# Altium PCB ljuc pcb.PcbDoc
Units mil, origin at the board's own origin, x right, y up, seen from the top; angles counter-clockwise.
Board outline 1722.09 x 1057.77 mil, 2 copper layers (Top Layer, Bottom Layer); 45 components, 45 nets, 138 pads, 20 vias.
Unrouted connection lines stored in the file: 1.
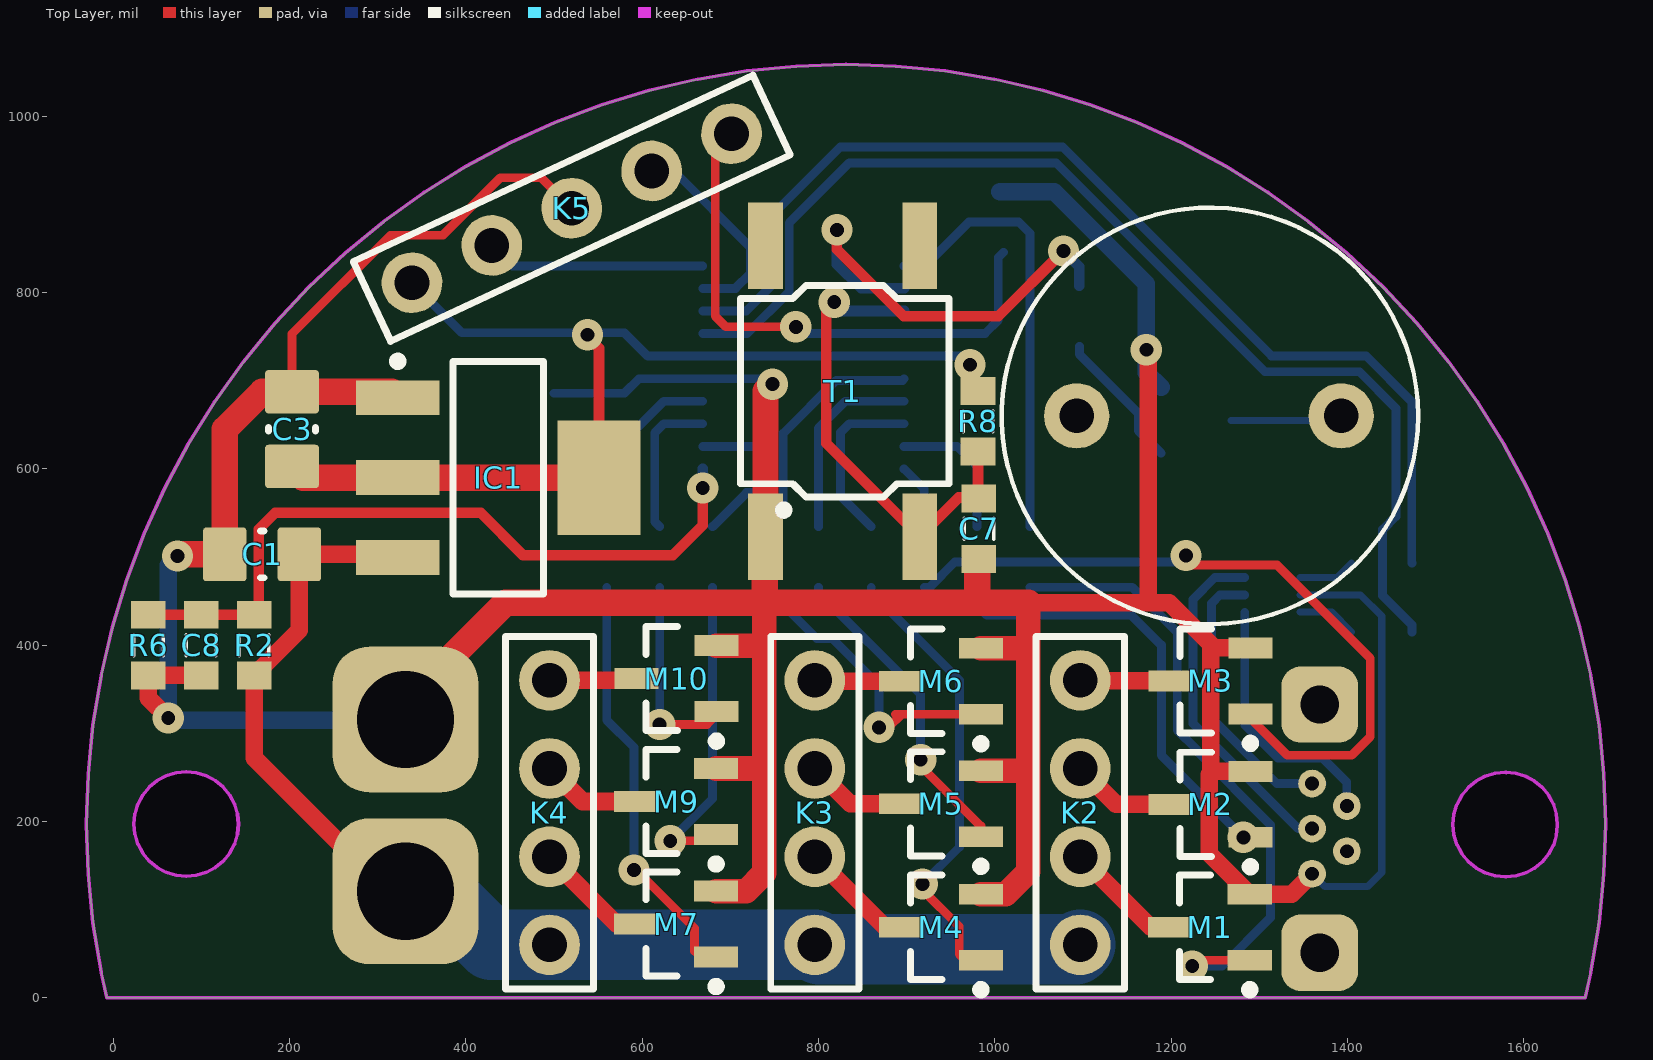
[diagram p0: Top Layer view]
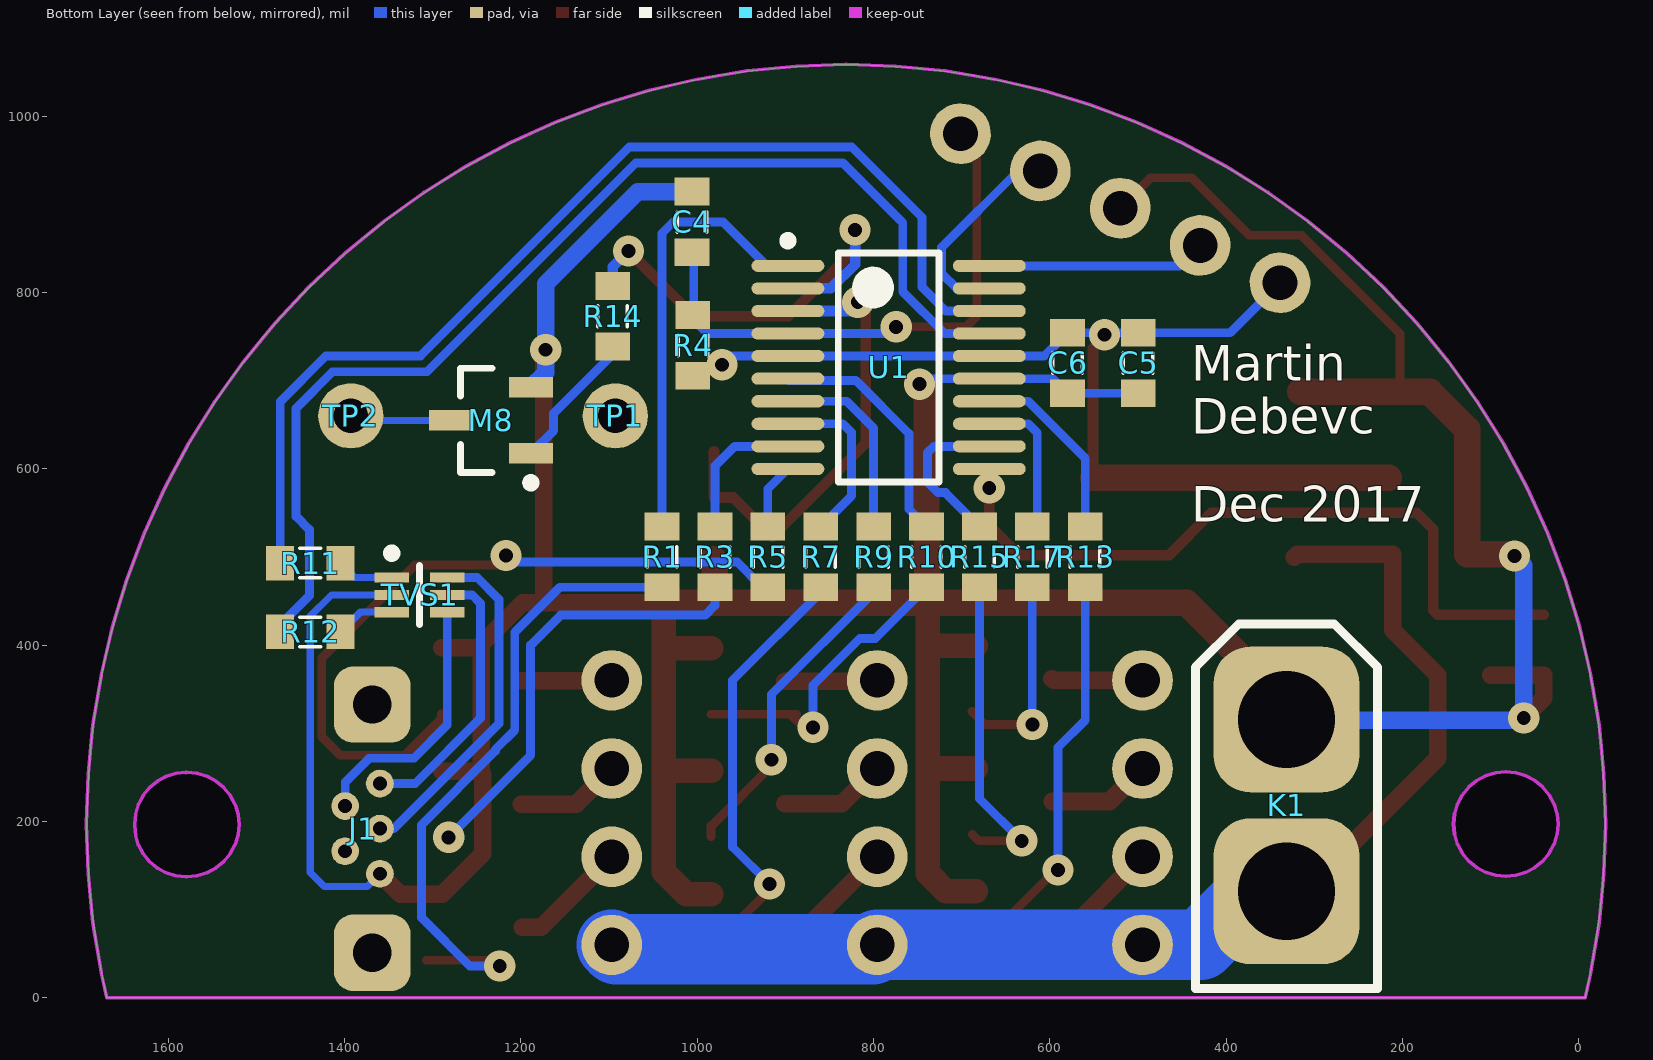
[diagram p1: Bottom Layer view, seen from below]

## Layer stack, top to bottom
Top Solder: solder mask 0.4, Solder Resist, Dk 3.5
Top Layer: signal copper 1.4
Dielectric 1: dielectric 12.6, FR-4, Dk 4.8
Bottom Layer: signal copper 1.4
Bottom Solder: solder mask 0.4, Solder Resist, Dk 3.5

## Board outline
-6.95,0.25 cw(c831.32,197.1) 1669.59,0.25
cut-out: 1638,196.5 ccw(c1579.5,197) 1580,255.5 1579,255.5 ccw(c1579,196.5) 1520,196.5 ccw(c1579,196.5) 1579,137.5 1580,137.5 ccw(c1580,195.5) 1638,195.5
cut-out: 142,197 ccw(c83,197) 83,256 ccw(c83,197) 24,197 ccw(c83,197) 83,138 ccw(c83,197)

## Design rules (kind name [scope] priority, off if disabled: settings)
Clearance [All] p1: gap=8
DiffPairsRouting [All] p1: maxlimit=10 minlimit=10 mostfreqgap=10 toplayer_minwidth=10 toplayer_maxwidth=10 toplayer_prefwidth=10 bottomlayer_minwidth=10 bottomlayer_maxwidth=10 bottomlayer_prefwidth=10 maxuncoupledlength=500
PolygonConnect [All] p1: connectstyle=Relief reliefconductorwidth=10 reliefentries=4 polygonreliefangle="90 Angle" airgapwidth=10
RoomDefinition "ljus sch" [InComponentClass('ljus sch')] p1 off: confinementstyle=ConfineIn formatcopy=TRUE lockcomponents=FALSE outline -1500,-2265 500,-2265 500,-1265 -1500,-1265
RoutingVias [All] p1: holewidth=28 width=50 viastyle="Through Hole" minholewidth=28 minwidth=50 maxholewidth=28 maxwidth=50
SolderMaskExpansion [All] p1: expansion=4
Width [All] p1: maxlimit=100 minlimit=6 preferedwidth=20 minimp=50.000000 maximp=50.000000 favimp=50.000000
28 further rules are at their usual default settings.

## Components (designator, comment, footprint, x,y, rotation, side; value= is the part's Value field where it differs from the comment)
C1 "10u" C0805(2012)_M 169,503 r180 top
C3 "10u" C0805(2012)_M 203,645 r90 top
C4 "100n" 0603 1006,880 r90 bottom
C5 "2u2" 0603 500,720 r270 bottom
C6 "100n" 0603 580,720 r270 bottom
C7 "100n" 0603 982,532 r270 top
C8 "100n" 0603 100,400 r270 top
IC1 "LM1117-3V3" SOT233 437,590 r0 top
J1 "USB Mini AB" USB3131-30-0230-A 1360,243 r270 bottom
K1 "H1x2" XT-30 435,424 r270 bottom
K2 "H1x4" H1x4 1097,60 r270 top
K3 "H1x4" H1x4 796,60 r270 top
K4 "H1x4" H1x4 495,60 r270 top
K5 "H1x5" H1x5 339,811 r205 top
M1 "BSS138" SOT23-BSS138 1244,80 r180 top
M2 "BSS138" SOT23-BSS138 1244.72,219.4 r180 top
M3 "BSS138" SOT23-BSS138 1244.72,359.4 r180 top
M4 "BSS138" SOT23-BSS138 939,80 r180 top
M5 "BSS138" SOT23-BSS138 939,220 r180 top
M6 "BSS138" SOT23-BSS138 939,359 r180 top
M7 "BSS138" SOT23-BSS138 638.72,83.6 r180 top
M8 "BSS138" SOT23-BSS138 1234,655 r0 bottom
M9 "BSS138" SOT23-BSS138 638.72,222.6 r180 top
M10 "BSS138" SOT23-BSS138 639,362 r180 top
R1 "220R" 0603 1040,500 r270 bottom
R2 "22k" 0603 160,400 r90 top
R3 "220R" 0603 980,500 r270 bottom
R4 "10k" 0603 1005,740 r270 bottom
R5 "220R" 0603 920,500 r270 bottom
R6 "6k8" 0603 40,400 r270 top
R7 "220R" 0603 860,500 r270 bottom
R8 "10k" 0603 981,654 r90 top
R9 "220R" 0603 800,500 r270 bottom
R10 "220R" 0603 740,500 r270 bottom
R11 "22E" 0603 1439,493 r180 bottom
R12 "22E" 0603 1439,415 r180 bottom
R13 "220R" 0603 560,500 r270 bottom
R14 "220R" 0603 1096,773 r270 bottom
R15 "220R" 0603 680,500 r270 bottom
R17 "220R" 0603 620,500 r270 bottom
T1 "MINI 6X6" "SW 5x6 SMD SHORT" 830,688 r90 top
TP1 "PAD" PAD_CIRC_HOLE 1093,660 r0 bottom
TP2 "PAD" PAD_CIRC_HOLE 1393,660 r0 bottom
TVS1 "USBLC6-2P6" SOT23127P600-8N 1315,457 r180 bottom
U1 "STM32F042F6Px" STM-TSSOP20_M 783,715 r180 bottom

## Footprints (in the part's own frame and the unit in brackets; to place one, negate y for a bottom-side part, rotate by r counter-clockwise, add the part's x,y. Pads: shape width x height; smd on the part's side, far side on the other; paste and mask are expansions set on the pad)
0603 [mm]
  rect 0.8x1 smd paste+0 mask+0.102: 1(-0.873,0) 2(0.873,0)
  silkscreen extent -0.3,-0.43 0.3,0.43, body extent -0.8,-0.4 0.8,0.4, height 0.45
C0805(2012)_M [mm] "Chip Capacitor, 2-Leads, Body 2.05x1.25mm, IPC Low Density"
  rrect15% 1.25x1.55 smd: 1(-1.075,0) 2(1.075,0)
  silkscreen extent -0.05,-0.67 0.05,0.67, body extent -1.1,-0.7 1.1,0.7, height 1.4
H1x4 [mm]
  round 1.75 hole 1: 1(0,0) 2(-2.54,0) 3(-5.08,0) 4(-7.62,0)
  silkscreen extent -8.89,-1.27 1.27,1.27, body extent -8.89,-1.27 1.27,1.27, height 8.4
H1x5 [mm]
  round 1.75 hole 1: 1(0,0) 2(-2.54,0) 3(-5.08,0) 4(-7.62,0) 5(-10.16,0)
  silkscreen extent -11.43,-1.27 1.27,1.27, body extent -11.43,-1.27 1.27,1.27, height 8.4
PAD_CIRC_HOLE [mil]
  round 74 hole 39.4: 1(0,0)
SOT23-BSS138 [mm]
  rect 1.27x0.6 smd: 1(-1.15,0.95) 2(-1.15,-0.95) 3(1.15,0)
  silkscreen extent -1.28,-1.5 0.87,1.92, body extent -1.14,-1.45 1.16,1.45, height 1.02
SOT233 [mm] "SOT223, 4-Leads, Body 6,7x7,3mm (max), Pitch 2,30mm, IPC Medium Density"
  rect 2.4x1 smd: 1(-2.9,2.3) 2(-2.9,0) 3(-2.9,-2.3)
  rect 2.4x3.3 smd: 2(2.9,0)
  silkscreen extent -3.02,-3.35 1.3,3.47, body extent -1.85,-3.35 1.85,3.35, height 1.8
SOT23127P600-8N [mm]
  rect 1x0.292 smd: 1(-0.8,0.5) 2(-0.8,0) 3(-0.8,-0.5) 4(0.8,-0.5) 5(0.8,0) 6(0.8,0.5)
  silkscreen extent -0.93,-0.85 0,1.32, body extent -0.65,-0.85 0.65,0.85, height 0.6
STM-TSSOP20_M [mm] "SOP, 20-Leads, Body 6.6x4.5mm, Pitch 0.65mm, IPC Low Density"
  oval 2.1x0.35 smd: 1(-2.9,2.925) 2(-2.9,2.275) 3(-2.9,1.625) 4(-2.9,0.975) 5(-2.9,0.325) 6(-2.9,-0.325) 7(-2.9,-0.975) 8(-2.9,-1.625) 9(-2.9,-2.275) 10(-2.9,-2.925) 11(2.9,-2.925) 12(2.9,-2.275) 13(2.9,-1.625) 14(2.9,-0.975) 15(2.9,-0.325) 16(2.9,0.325) 17(2.9,0.975) 18(2.9,1.625) 19(2.9,2.275) 20(2.9,2.925)
  silkscreen extent -3.03,-3.3 1.45,3.77, body extent -2.25,-3.3 2.25,3.3, height 1.2
"SW 5x6 SMD SHORT" [mil]
  rect 98.43x39.37 smd: 1(-165,90) 2(-165,-85) 3(165,-85) 4(165,90)
  silkscreen extent -140,-118 120,118, body extent -175,-115 179,121, height 197
USB3131-30-0230-A [mm]
  round 0.8 hole 0.4: 1(0,0) 2(0.65,-1) 3(1.3,0) 4(1.95,-1) 5(2.6,0)
  rrect50% 2.2x2.2 hole 1.1: S(-2.275,-0.22) S(4.875,-0.22)
  body extent -2.67,-1.68 5.27,1.25, height 1.47
XT-30 [mm]
  rrect50% 4.2x4.2 hole 2.8: 1(7.7,2.625) 2(2.75,2.625)
  silkscreen extent 0,0 10.5,5.25, body extent 0,0 10.45,5.25, height 12.6

## Part data
C1 C3 C4 C5 C6 C7 C8: library part C, "Capacitor"
J1: "SOCKET, USB MINI-AB THRU HOLE"
K1: "Header 1x2 (male)"
K2 K3 K4: "Header 1x4 (male)"
K5: "Header 1x5 (male)"
R1 R2 R3 R4 R5 R6 R7 R8 R9 R10 R13 R14 R15 R17: library part R, "R"
R11 R12: library part Res2, "Resistor"

## Via types
v1: diameter 35.43, hole 15.75, Top Layer to Bottom Layer, tented both sides, 20 vias

## Nets (pads, with @x,y where several pads share a name; then routed paths per layer and width w, separated by ;. In a path a pad name is that pad's centre, name@x,y a point inside that pad or via, vN(x,y) a via of type N, cw(c..) or ccw(c..) an arc to the next point about the centre after c; other vN are vias at no path point)
ADC0: C8.1 R2.2 R6.1 U1.11 | length 828.3
  Top Layer w12: R6.1 C8.1 R2.2 ; R2.2 165.28,439.65 165.28,531.28 184,550 417,550 465,502 635,502 668.83,535.83 v1(668.83,578.17)
  Bottom Layer w12: v1(668.83,578.17) U1.11
B1: K2.4 M3.3 | length 102.7
  Top Layer w20: K2.4 1097.6,359.4 M3.3
B2: K3.4 M6.3 | length 105.1
  Top Layer w20: K3.4 797,359 M6.3 M6.3@900.72,359
B3: K4.4 M10.3 | length 103.6
  Top Layer w20: K4.4 595.72,360 M10.3@597.72,362
Button: C7.1 R8.1 T1.2 U1.3 | length 533.6
  Top Layer w12: v1(818,789) 809,780 809,629 T1.2 959.38,567.38 981,567.38 R8.1
  Bottom Layer w12: v1(818,789) 828.02,778.98 U1.3
Buzz: R14.1 U1.2 | length 514.7
  Top Layer w12: v1(821,871) 821,849 897,773 1004,773 v1(1078,847)
  Bottom Layer w12: v1(821,871) 821,832 848.43,804.57 U1.2 ; v1(1078,847) 1096,829 R14.1
G1: K2.3 M2.3 | length 119.3
  Top Layer w20: K2.3 1137.6,219.4 M2.3
G2: K3.3 M5.3 | length 121.3
  Top Layer w20: K3.3 836,220 M5.3 M5.3@900.72,220
G3: K4.3 M9.3 | length 117.9
  Top Layer w20: K4.3 532.4,222.6 M9.3 M9.3@597.45,222.6
G4: R7.1 U1.8 | length 197.4
  Bottom Layer w10: R7.1 825,569.38 825,641 835.02,651.02 U1.8
G5: R3.1 U1.9 | length 160.7
  Bottom Layer w10: U1.9 957.57,625.43 980,603 R3.1
G6: R5.1 U1.10 | length 74.9
  Bottom Layer w10: U1.10 920,577.02 R5.1
G7: R15.1 U1.12 | length 186.2
  Bottom Layer w10: U1.12 731.57,625.43 739,618 739,585 727,573 718.62,573 R15.1
G8: R17.1 U1.13 | length 167.3
  Bottom Layer w10: R17.1 614.49,539.89 614.49,640.84 624.67,651.02 U1.13
G9: R13.1 U1.14 | length 213.2
  Bottom Layer w10: R13.1 560,611.81 612.69,664.5 612.69,664.69 624.61,676.61 U1.14
G11: R1.1 U1.1 | length 501.5
  Bottom Layer w10: U1.1 921.16,830.16 971,880 1027,880 1040,867 R1.1
G22: R10.1 U1.6 | length 276.8
  Bottom Layer w10: R10.1 760,554.38 760,640 820.28,700.28 895.25,700.28 U1.6
G33: R9.1 U1.7 | length 221.5
  Bottom Layer w10: R9.1 800,646 830.61,676.61 U1.7
GND: C1.2 C3.2 C4.2 C5.2 C6.2 C7.2 C8.2 IC1.1 J1.5 K1.2 K5.3 M1.2 M2.2 M3.2 M4.2 M5.2 M6.2 M7.2 M8.2 M9.2 M10.2 R6.2 T1.1 TVS1.2 U1.15 | length 5511.1
  Top Layer w10: C3.2 203,753 314.81,864.81 374.08,864.81 439.27,930 485.79,930 K5.3
  Top Layer w20: v1(62.56,317.44) 40,340 R6.2 C8.2 ; 1038,448 1174,448 ; v1@1174,733 1174,448 ; M2.2 1246.8,256.8 1245,255 ; M3.2 1249.2,396.8 1245,401 ; J1.5 1336.76,117.4 M1.2 1243.28,163.39 1243.28,253.28 1245,255 ; 1174,448 1198,448 1245,401 ; 1245,255 1245,401
  Top Layer w28: M7.2 718,121 738.55,141.55 738.55,265 ; M9.2 733.55,260 738.55,265 ; M10.2 733.95,399.4 ; 739,448 738.55,447.55 738.55,265 ; M4.2 1012.4,117.4 1038,143 1038,259 ; M5.2 1036.4,257.4 1038,259 ; M6.2 1036.4,396.4 ; 1038,448 1038,259
  Top Layer w30: v1@72,503 C1.2 126.68,644.68 169.32,687.32 C3.2 IC1.1@316.06,687.32 ; K1.2@312,314.88 445.12,448 739,448 ; T1.1@739,522 739,448 ; T1.1 v1@740,688 ; C7.2 980,495.63 980,448 ; 1038,448 980,448 ; 739,448 980,448
  Bottom Layer w8: TVS1.2 1415.03,457 1439,433.03 1439,142 1423,126 1374.64,126 J1.5
  Bottom Layer w10: C5.2 C6.2 596.57,702.2 U1.15 v1@741.8,702.2
  Bottom Layer w20: v1@60,320 65.12,314.88 K1.2@312,314.88 ; v1(62.56,317.44) 62.56,490.56 v1(73,501) ; C4.2 1067.63,914.37 1172,810 v1(1172,735) 1172,709.13 M8.2
  other v1: 748,696
NetJ1_2: J1.2 TVS1.4 | length 297.8
  Bottom Layer w10: TVS1.4 1283.5,309.5 1321.25,271.75 1372.25,271.75 1399.37,244.63 J1.2
NetJ1_3: J1.3 TVS1.6 | length 394.1
  Bottom Layer w10: TVS1.6 1249.68,476.68 1225,452 1225,311 1344.18,191.82 J1.3
NetM1_G: M1.1 R1.2 | length 752.9
  Top Layer w10: v1(1224,36) 1230.6,42.6 M1.1 M1.1@1306.99,42.6
  Bottom Layer w10: R1.2 1155.91,465.63 1207,414.54 1207,303.54 1229,281.54 1229,280 1312.72,196.28 1312.72,90.72 1258,36 v1(1224,36)
NetM2_G: M2.1 R3.2 | length 504.8
  Bottom Layer w10: R3.2 980,445 991,434 1155,434 1189,400 1189,275 v1(1282,182)
NetM3_G: M3.1 R5.2 | length 845.3
  Top Layer w10: v1(1217,501.5) 1217,497 1211,491 1320,491 1426,385 1426,296 1405,275 1332,275 1290,317 M3.1
  Bottom Layer w10: R5.2 926.18,465.63 954.93,494.38 1207.62,494.38 1211,491 1217,497 v1(1217,501.5)
NetM4_G: M4.1 R7.2 | length 526.7
  Top Layer w10: v1(918,129) 918,122.54 959.75,80.79 959.75,49.41 966.56,42.6 M4.1 M4.1@991.28,42.6
  Bottom Layer w10: R7.2 860,460 960,360 960,171 v1(918,129)
NetM5_G: M5.1 R9.2 | length 362.3
  Top Layer w10: v1@909,270 984.28,194.72 M5.1
  Bottom Layer w10: R9.2 800,460 916,344 v1(916,270)
NetM6_G: M6.1 R10.2 | length 351.1
  Top Layer w10: v1(868.75,306.75) 879.57,306.75 894.42,321.6 ; 887.42,321.6 894.42,321.6 ; M6.1 894.42,321.6
  Bottom Layer w10: R10.2 798.18,407.45 815.65,407.45 868.75,354.35 v1(868.75,306.75)
NetM7_G: M7.1 R13.2 | length 486.5
  Top Layer w10: v1(591,145) 593.18,145 659.47,78.71 659.47,53.01 666.28,46.2 M7.1 M7.1@688,46.2
  Bottom Layer w10: R13.2 560,314.85 591,283.85 v1(591,145)
NetM8_D: M8.3 TP2.1 | length 119.7
  Bottom Layer w8: M8.3@1268.28,655 TP2.1@1388,655
NetM8_G: M8.1 R14.2 | length 159.4
  Bottom Layer w10: R14.2 1096,729.93 1163,662.93 1163,643.32 M8.1
NetM9_G: M9.1 R15.2 | length 366.5
  Top Layer w10: v1(632,178) 680.8,178 M9.1@688,185.2
  Bottom Layer w10: v1(632,178) 680,226 R15.2
NetM10_G: M10.1 R17.2 | length 230
  Top Layer w10: v1(620,310) 673.68,310 M10.1@688.28,324.6
  Bottom Layer w10: v1(620,310) R17.2
NetR11_2: R11.2 TVS1.1 | length 64.9
  Bottom Layer w8: TVS1.1 1388.31,476.68 R11.2
NetR12_2: R12.2 TVS1.3 | length 67.4
  Bottom Layer w8: TVS1.3 1382.32,437.31 R12.2
nRST: C4.1 K5.5 R4.1 U1.4 | length 645.3
  Top Layer w10: K5.5 683,961.52 683,773 695,761 v1(774.43,761)
  Bottom Layer w10: v1(774.43,761) 766.72,753.28 897.07,753.28 U1.4 989.01,753.39 1004,768.38 1004,839.62 C4.1@1010,845.62
R1: K2.2 M1.3 | length 134.9
  Top Layer w20: K2.2 1177,80 M1.3
R2: K3.2 M4.3 | length 137.9
  Top Layer w20: K3.2 876,80 M4.3 M4.3@900.72,80
R3: K4.2 M7.3 | length 134.1
  Top Layer w20: K4.2 571.4,83.6 M7.3 M7.3@597.45,83.6
SWCLK: K5.2 U1.20 | length 248.8
  Bottom Layer w10: K5.2 452.74,830.16 U1.20
SWDIO: K5.4 U1.19 | length 238.7
  Bottom Layer w10: K5.4 636.21,937.79 723.17,850.83 723.17,821.92 705.81,804.57 U1.19
USB_N: R12.1 U1.17 | length 1301.1
  Bottom Layer w10: U1.17 719.39,753.39 767,801 767,879 835,947 1069.54,947 1306.54,710 1413.71,710 1455,668.71 1455,546 1440,531 1440,456.08 1473.38,422.7 R12.1
USB_P: R11.1 U1.18 | length 1230.5
  Bottom Layer w10: U1.18 717.98,778.98 745,806 745,885 825,965 1077,965 1314,728 1421.17,728 1473,676.17 1473,493.38 R11.1
USB_VBUS: J1.1 TVS1.5 | length 328
  Bottom Layer w10: TVS1.5 1255.46,457 1246,447.54 1246,317 1320,243 J1.1 J1.1@1371.41,243
VCC: C3.1 C5.1 C6.1 IC1.2 K5.1 R4.2 R8.2 U1.5 U1.16 | length 1171.2
  Top Layer w12: v1@536,752 551.17,736.83 IC1.2@551.17,590
  Top Layer w30: C3.1@215.68,590 322.83,590 IC1.2@551.17,590
  Bottom Layer w10: K5.1 395.62,754.38 C5.1 C6.1 606.58,727.8 U1.16 U1.5 v1@972,727.8
  other v1: 972,718 538,752
VIN: C1.1 IC1.3 K1.1 K2.1 K3.1 K4.1 R2.1 TP1.1 | length 1394.2
  Top Layer w20: K1.1@312,120 160,272 R2.1 211.32,416.94 C1.1 319.28,503 IC1.3
  Bottom Layer w25: K1.1@312,120 K1.1@326,120
  Bottom Layer w80: K1.1@326,120 369,120 429,60 K4.1 K3.1 801,55 1092,55 K2.1
pads on no net: J1.4 J1.S T1.3 T1.4

## Keep-outs
Keep-Out Layer:
  lines w4: 23.71,197 24.85,185.43 ; 23.71,197 24.85,208.57 ; 23.71,197 24.85,185.43 ; 23.71,197 24.85,208.57 ; 24.85,185.43 28.23,174.31 ; 24.85,185.43 28.23,174.31 ; 24.85,208.57 28.23,219.69 ; 24.85,208.57 28.23,219.69 ; 28.23,174.31 33.71,164.06 ; 28.23,174.31 33.71,164.06 ; 28.23,219.69 33.71,229.94 ; 28.23,219.69 33.71,229.94 ; 33.71,164.06 41.08,155.08 ; 33.71,164.06 41.08,155.08 ; 33.71,229.94 41.08,238.92 ; 33.71,229.94 41.08,238.92 ; 41.08,155.08 50.06,147.71 ; 41.08,155.08 50.06,147.71 ; 41.08,238.92 50.06,246.29 ; 41.08,238.92 50.06,246.29 ; 50.06,147.71 60.31,142.23 ; 50.06,147.71 60.31,142.23 ; 50.06,246.29 60.31,251.77 ; 50.06,246.29 60.31,251.77 ; 60.31,142.23 71.43,138.85 ; 60.31,142.23 71.43,138.85 ; 60.31,251.77 71.43,255.15 ; 60.31,251.77 71.43,255.15 ; 71.43,138.85 83,137.71 ; 71.43,138.85 83,137.71 ; 71.43,255.15 83,256.29 ; 71.43,255.15 83,256.29 ; 83,137.71 94.57,138.85 ; 83,137.71 94.57,138.85 ; 83,256.29 94.57,255.15 ; 83,256.29 94.57,255.15 ; 94.57,138.85 105.69,142.23 ; 94.57,138.85 105.69,142.23 ; 94.57,255.15 105.69,251.77 ; 94.57,255.15 105.69,251.77 ; 105.69,142.23 115.94,147.71 ; 105.69,142.23 115.94,147.71 ; 105.69,251.77 115.94,246.29 ; 105.69,251.77 115.94,246.29 ; 115.94,147.71 124.92,155.08 ; 115.94,147.71 124.92,155.08 ; 115.94,246.29 124.92,238.92 ; 115.94,246.29 124.92,238.92 ; 124.92,155.08 132.29,164.06 ; 124.92,155.08 132.29,164.06 ; 124.92,238.92 132.29,229.94 ; 124.92,238.92 132.29,229.94 ; 132.29,164.06 137.77,174.31 ; 132.29,164.06 137.77,174.31 ; 132.29,229.94 137.77,219.69 ; 132.29,229.94 137.77,219.69 ; 137.77,174.31 141.15,185.43 ; 137.77,174.31 141.15,185.43 ; 137.77,219.69 141.15,208.57 ; 137.77,219.69 141.15,208.57 ; 141.15,185.43 142.29,197 ; 141.15,185.43 142.29,197 ; 141.15,208.57 142.29,197 ; 141.15,208.57 142.29,197 ; 1519.71,196.5 1520.85,184.93 ; 1519.71,196.5 1520.85,208.07 ; 1519.71,196.5 1520.85,184.93 ; 1519.71,196.5 1520.85,208.07 ; 1520.85,184.93 1524.23,173.81 ; 1520.85,184.93 1524.23,173.81 ; 1520.85,208.07 1524.23,219.19 ; 1520.85,208.07 1524.23,219.19 ; 1524.23,173.81 1529.71,163.56 ; 1524.23,173.81 1529.71,163.56 ; 1524.23,219.19 1529.71,229.44 ; 1524.23,219.19 1529.71,229.44 ; 1529.71,163.56 1537.08,154.58 ; 1529.71,163.56 1537.08,154.58 ; 1529.71,229.44 1537.08,238.42 ; 1529.71,229.44 1537.08,238.42 ; 1537.08,154.58 1546.06,147.21 ; 1537.08,154.58 1546.06,147.21 ; 1537.08,238.42 1546.06,245.79 ; 1537.08,238.42 1546.06,245.79 ; 1546.06,147.21 1556.31,141.73 ; 1546.06,147.21 1556.31,141.73 ; 1546.06,245.79 1556.31,251.27 ; 1546.06,245.79 1556.31,251.27 ; 1556.31,141.73 1567.43,138.35 ; 1556.31,141.73 1567.43,138.35 ; 1556.31,251.27 1567.43,254.65 ; 1556.31,251.27 1567.43,254.65 ; 1567.43,138.35 1579,137.21 ; 1567.43,138.35 1579,137.21 ; 1567.43,254.65 1579,255.79 ; 1567.43,254.65 1579,255.79 ; 1579,137.21 1579,137.5 ; 1579,137.21 1579,137.5 ; 1579,137.5 1580,137.22 ; 1579,137.5 1580,137.22 ; 1579,255.79 1580,255.5 ; 1579,255.79 1580,255.5 ; 1580,137.22 1591.37,138.34 ; 1580,137.22 1580,137.22 ; 1580,137.22 1591.37,138.34 ; 1580,137.22 1580,137.22 ; 1580,255.5 1580,255.74 ; 1580,255.5 1580,255.74 ; 1580,255.74 1590.97,254.66 ; 1580,255.74 1590.97,254.66 ; 1590.97,254.66 1602,251.31 ; 1590.97,254.66 1602,251.31 ; 1591.37,138.34 1602.3,141.66 ; 1591.37,138.34 1602.3,141.66 ; 1602,251.31 1612.16,245.88 ; 1602,251.31 1612.16,245.88 ; 1602.3,141.66 1612.38,147.04 ; 1602.3,141.66 1612.38,147.04 ; 1612.16,245.88 1621.07,238.57 ; 1612.16,245.88 1621.07,238.57 ; 1612.38,147.04 1621.21,154.29 ; 1612.38,147.04 1621.21,154.29 ; 1621.07,238.57 1628.38,229.66 ; 1621.07,238.57 1628.38,229.66 ; 1621.21,154.29 1628.46,163.12 ; 1621.21,154.29 1628.46,163.12 ; 1628.38,229.66 1633.81,219.5 ; 1628.38,229.66 1633.81,219.5 ; 1628.46,163.12 1633.84,173.2 ; 1628.46,163.12 1633.84,173.2 ; 1633.81,219.5 1637.16,208.47 ; 1633.81,219.5 1637.16,208.47 ; 1633.84,173.2 1637.16,184.13 ; 1633.84,173.2 1637.16,184.13 ; 1637.16,184.13 1638.28,195.5 ; 1637.16,184.13 1638.28,195.5 ; 1637.16,208.47 1638.29,197 ; 1637.16,208.47 1638.29,197 ; 1638,195.5 1638.24,196.5 ; 1638,195.5 1638.28,195.5 ; 1638,195.5 1638.24,196.5 ; 1638,195.5 1638.28,195.5 ; 1638.24,196.5 1638.29,197 ; 1638.24,196.5 1638.29,197 ; 1638.28,195.5 1638.28,195.5 ; 1638.28,195.5 1638.28,195.5 ; 1669.59,0.25 -6.95,0.25 -13.66,29.02 -22.84,84.65 -28.37,140.75 -30.21,197.1 -28.37,253.45 -22.84,309.55 -13.66,365.18 -0.86,420.08 15.51,474.03 35.37,526.79 58.64,578.15 85.21,627.87 114.98,675.74 147.82,721.57 183.59,765.15 222.13,806.3 263.27,844.83 306.85,880.6 352.68,913.44 400.56,943.21 450.28,969.79 501.63,993.05 554.39,1012.91 608.34,1029.28 663.24,1042.08 718.87,1051.26 774.97,1056.79 831.32,1058.63 887.67,1056.79 943.77,1051.26 999.4,1042.08 1054.3,1029.28 1108.25,1012.91 1161.02,993.05 1212.37,969.79 1262.09,943.21 1309.96,913.44 1355.79,880.6 1399.37,844.83 1440.52,806.3 1479.06,765.15 1514.82,721.57 1547.66,675.74 1577.43,627.87 1604.01,578.15 1627.27,526.79 1647.13,474.03 1663.5,420.08 1676.3,365.18 1685.48,309.55 1691.01,253.45 1692.85,197.1 1691.01,140.75 1685.48,84.65 1676.3,29.02 1669.59,0.25 ; 1669.59,0.25 1669.59,0.25

## Other copper
Top Layer:
  pour cut-out: 142,197 ccw(c83,197) 83,256 ccw(c83,197) 24,197 ccw(c83,197) 83,138 ccw(c83,197)

## Silkscreen, mask and mechanical layers (free items; w line width, h text height)
Top Overlay:
  circle w5: c1244,660 r236.22
Bottom Overlay:
  text "Martin" at 440,700 h40
  text "Debevc" at 440,640 h40
  text "Dec 2017" at 440,540 h40
Mechanical 1:
  circle w0.5: c1579.35,197.1 r59.06
  circle w0.5: c83.29,197.1 r59.06
  lines w0.5: -6.95,0.25 cw(c831.32,197.1) 1669.59,0.25 -6.95,0.25